# Altium PCB Shopping_Cart.PcbDoc (part 1 of 2)
Units mil, origin at the board's own origin, x right, y up, seen from the top; angles counter-clockwise.
Board outline 3350 x 1865 mil, 2 copper layers (Top Layer, Bottom Layer); 76 components, 56 nets, 246 pads, 179 vias.
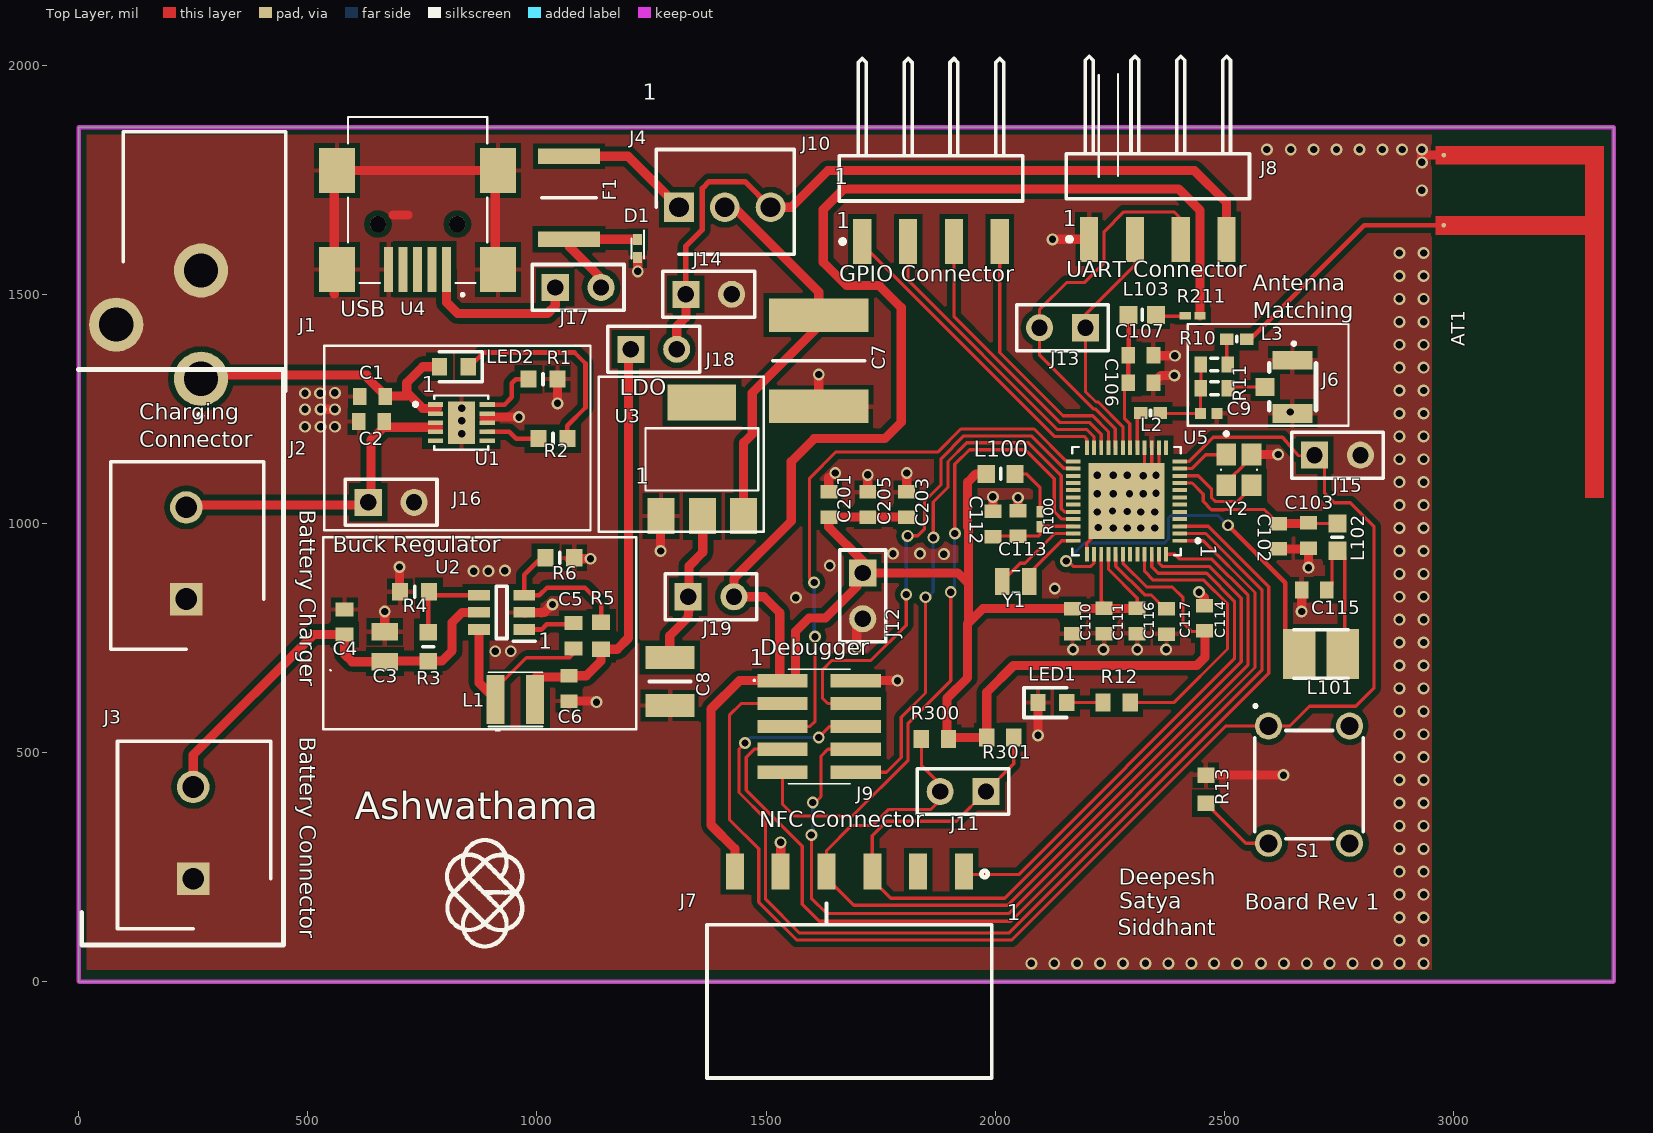
[diagram p0: Top Layer view]
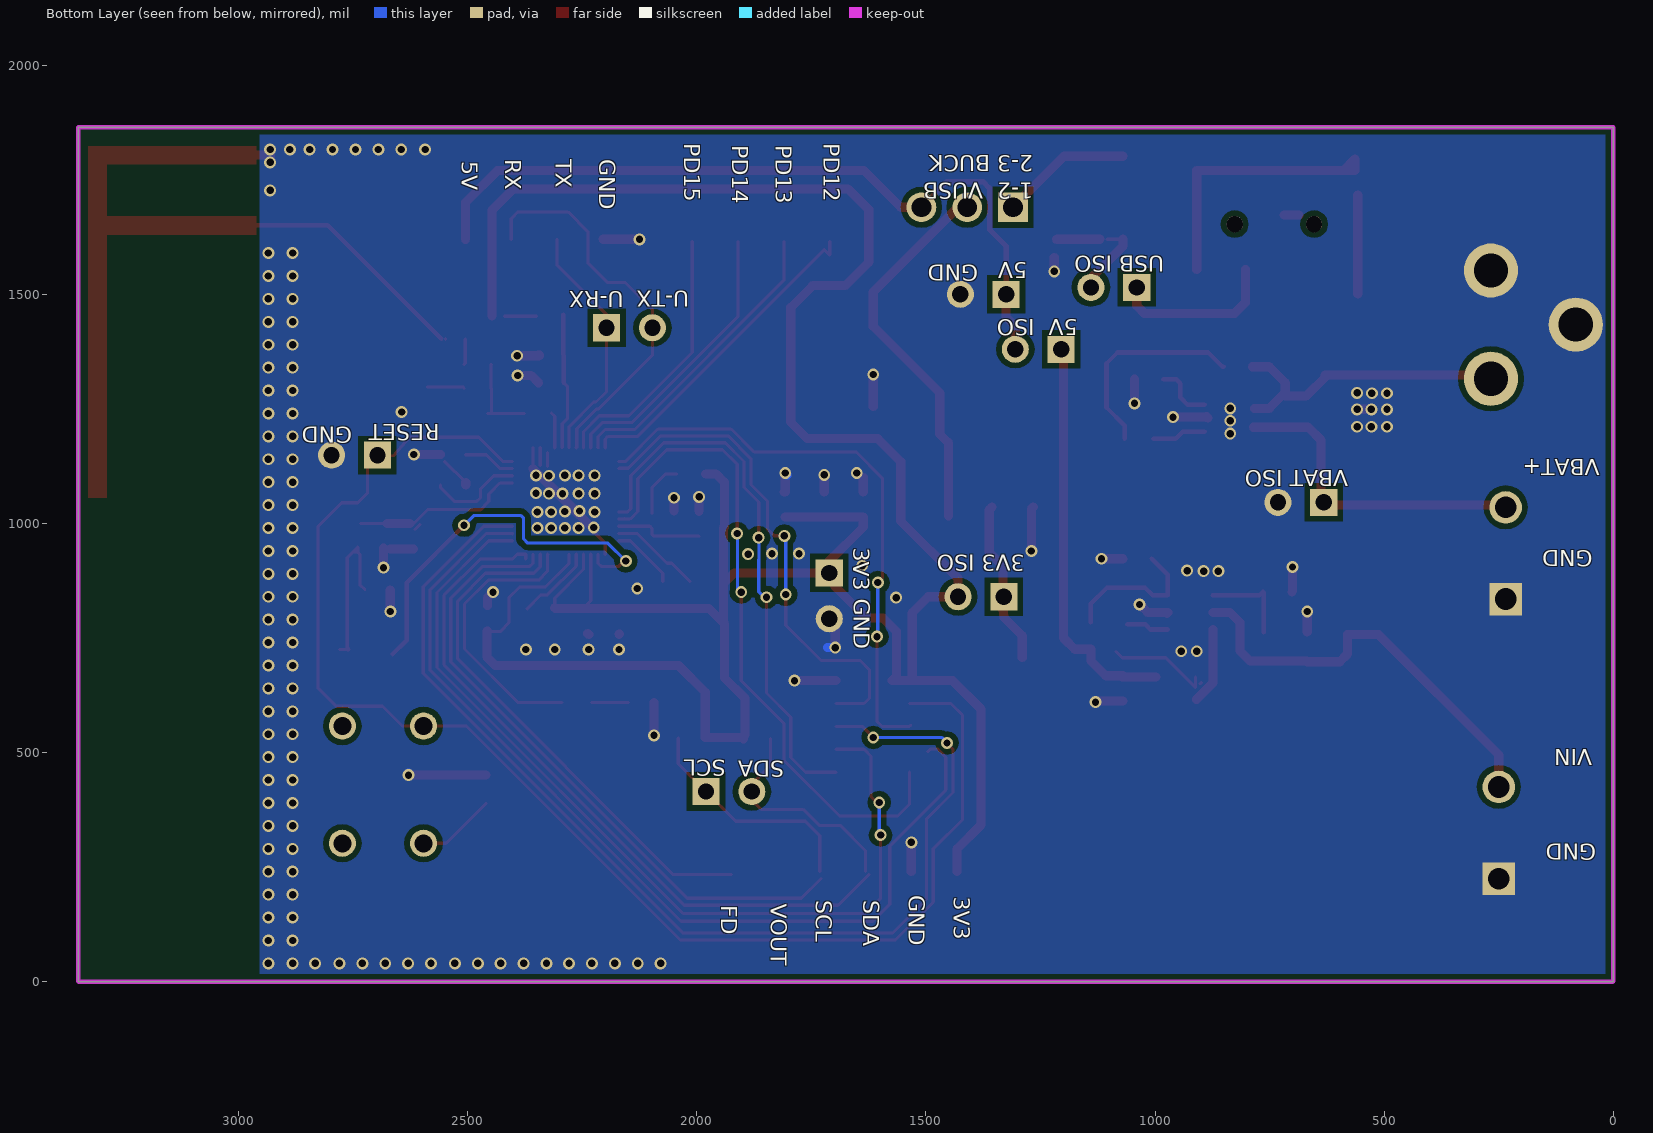
[diagram p1: Bottom Layer view, seen from below]
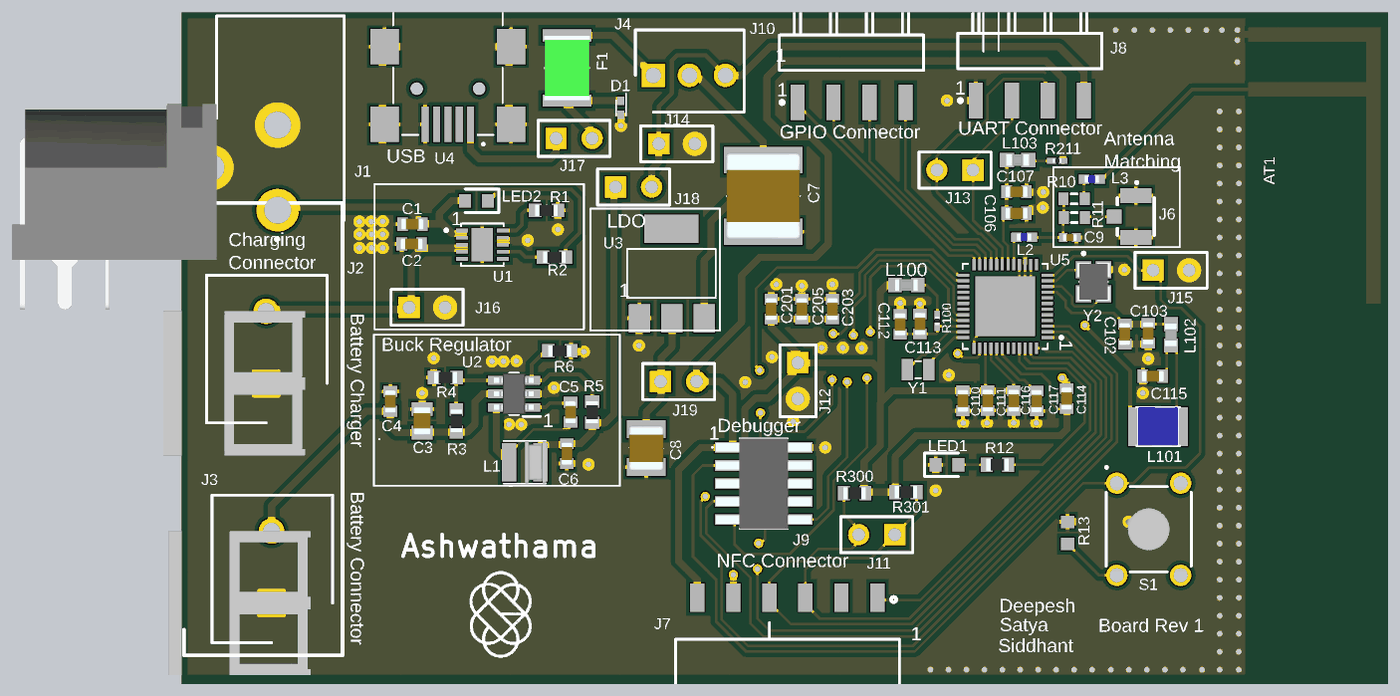
[diagram p2: 3D render of the assembled board from above, using the file's embedded part models]

## Layer stack, top to bottom
Top Solder: solder mask 0.4, Solder Resist, Dk 3.5
Top Layer: signal copper 1.4
Dielectric1: dielectric 12.6, FR-4, Dk 4.8
Bottom Layer: signal copper 1.4
Bottom Solder: solder mask 0.4, Solder Resist, Dk 3.5

## Board outline
0,0 0,1865 3350,1865 3350,0

## Design rules (kind name [scope] priority, off if disabled: settings)
Clearance [All] p1: gap=10 ignorepadtopadclearanceinfootprint=FALSE except(0: Arc-Hole Track-Hole SMDPad-Hole THPad-Hole Via-Hole Fill-Hole Poly-Hole Region-Hole Text-Hole; 7: Arc-SMDPad Arc-Via Track-SMDPad Track-Via SMDPad-SMDPad SMDPad-Via THPad-Via Via-Via Via-Fill Via-Region Via-Text; 8: Arc-Track Track-Track; 12: Arc-Poly Track-Poly SMDPad-Poly THPad-Poly Via-Poly Fill-Poly Poly-Poly)
ComponentClearance [All] p1: gap=10 collisioncheckmode=3 verticalgap=10 showdistances=TRUE
FabricationTestPointUsage TestPointUsage [All] p1: valid=0 allowmultiple=FALSE
FabricationTestpoint Testpoint [All] p1: side=3 testpointundercomponent=TRUE minsize=40 maxsize=100 preferedsize=60 minholesize=0 maxholesize=40 preferedholesize=32 testpointgrid=1 allowsidetop=TRUE allowsidebottom=TRUE usegrid=TRUE gridtolerance=0.01
PlaneConnect [All] p1: planeconnectstyle=Direct reliefexpansion=20 reliefentries=4 reliefconductorwidth=10 reliefairgap=10
PolygonConnect [All] p1: thpad.connectstyle=Direct thpad.reliefconductorwidth=10 thpad.reliefentries=4 thpad.polygonreliefangle="90 Angle" thpad.airgapwidth=10 smdpad.connectstyle=Relief smdpad.reliefconductorwidth=10 smdpad.reliefentries=4 smdpad.polygonreliefangle="90 Angle" smdpad.airgapwidth=10 via.connectstyle=Direct via.reliefconductorwidth=10 via.reliefentries=4 via.polygonreliefangle="90 Angle" via.airgapwidth=10
RoutingVias [All] p1: holewidth=10 width=20 viastyle="Through Hole" minholewidth=8 minwidth=10 maxholewidth=20 maxwidth=50
SilkToSolderMaskClearance SilkscreenOverComponentPads [IsPad] p1: minsilkscreentomaskgap=10 clearancetoexposedcopper=TRUE
SolderMaskExpansion [All] p1: expansion=4
Width [InNet('5V') or InNet('GND') or InNet('3V3')] p1: maxlimit=24 minlimit=7 preferedwidth=20
Width Signal [All] p2: maxlimit=20 minlimit=6 preferedwidth=7
25 further rules are at their usual default settings.

## Classes and differential pairs
component class "Power Supply": D1 J2 J3 J17 U4
component class Peripherals: J7 J8 J9 J10 J11 J12 J13 J14 J15 R300 R301
component class MicroController: C102 C103 C106 C107 C110 C111 C112 C113 C114 C115 C116 C117 C201 C203 C205 L100 L101 L102 L103 LED1 R12 R13 R100 R211 S1 U5 Y1 Y2
component class LDO-Regulator: C7 C8 F1 J4 J19 U3
component class F_Antenna: C9 J6 L2 L3 R10 R11
component class Buck-Regulator: C3 C4 C5 C6 J18 L1 R3 R4 R5 R6 U2
component class Battery_Management: C1 C2 J1 J16 LED2 R1 R2 U1

## Components (designator, comment, footprint, x,y, rotation, side; value= is the part's Value field where it differs from the comment)
AT1 "INVERTED_F" ANT_INV_F_2.4_GHZ_FS_19.5MM_MIR 2961.15,1823.51 r270 top net-tie
C1 "GRM188R61E475KE11D" CAPC1608X90N 641,1277 r180 top value=4U7
C2 "GRM188R61E475KE11D" CAPC1608X90N 639,1222 r0 top value=4U7
C3 "GRM21BR71C225KA12L" CAPC2012X145N 668,731 r270 top value=2U2
C4 "C0603C104K4RECTU" CAPC1608X87N 580,785 r270 top value=0U1
C5 "C0603C104K4RECTU" CAPC1608X87N 1080,755 r90 top value=0U1
C6 "GRM1885C2A150JA01D" CAPC1608X90N 1070,640 r270 top value=15U
C7 "KCM55LR71E156KH01K" CAPC6153X300N 1615,1355 r90 top value=10U
C8 "GRM32ER71C226KEA8L" CAPC3225X270N 1290,655 r90 top value=22U
C9 "GRM1555C1H1R5WA01D" CAPC1005X55N 2466.04,1240 r180 top value=1P5
C102 "GCM1885C1H101JA16D" CAPC1608X90N 2618.44,972 r270 top value=100P
C103 "GRM1885C1H100JA01D" CAPC1608X90N 2683.6,973.85 r270 top value=10P
C106 "GRM188R71C224KA01D" CAPC1608X90N 2318,1307 r0 top value=220N
C107 "GRM1885C1H100JA01D" CAPC1608X90N 2318,1367 r0 top value=10P
C110 "GRM188R60J106ME84D" CAPC1608X90N 2169,786.56 r90 top value=10U
C111 "GRM188R61E105KAADD" CAPC1608X90N 2238,787.12 r270 top value=1U
C112 "GRM188R60J106ME84D" CAPC1608X90N 1995,999 r270 top value=10U
C113 "CC0603KRX7R7BB103" CAPC1608X90N 2050,1000 r270 top value=10N
C114 "GRM188R61E105KAADD" CAPC1608X90N 2457,793 r90 top value=1U
C115 "GRM188R61E475KE11D" CAPC1608X90N 2696.44,855 r180 top value=4U7
C116 "GCM188R71C104KA37D" CAPC1608X90N 2310,787 r270 top value=100N
C117 "GRM188R61E105KAADD" CAPC1608X90N 2374,786 r270 top value=1U
C201 "GCM188R71C104KA37D" CAPC1608X90N 1637,1041.28 r270 top value=100N
C203 "GCM188R71C104KA37D" CAPC1608X90N 1807,1041.28 r270 top value=100N
C205 "GRM188R61C106KAALJ" CAPC1608X90N 1722,1041.28 r270 top value=10U
D1 "TPD1E10B06DPYT" DPY(R-PX1SON-N2) 1220,1600 r270 top
F1 "MF-MSMF050-2" FUSC4632X85N 1070,1710.55 r270 top
J1 "PJ-102A" PJ-102AH 97.71,1433.89 r0 top
J2 "282837-2" SHDR2W100P0X508_1X2_1016X820X1030P 235,835 r90 top
J3 "282837-2" SHDR2W100P0X508_1X2_1016X820X1030P 250,225 r90 top
J4 "61900311121" SHDR3W64P0X254_1X3_766X580X1175P 1310,1690 r0 top
J6 "U.FL-R-SMT(01)" U.FL-R-SMT(01) 2649.04,1298 r270 top
J7 "BG300-06-X-X-A_REVC" *GCT_BG300-06-X-X-A_REVC 1682,35 r180 top
J8 "BG301-04-X-XXXX-X-X_REVC" *GCT_BG301-04-X-XXXX-X-X_REVC 2355,1620 r0 top
J9 "FTSH-105-01-L-DV-K-TR" FTSH10501LDVKTR 1616,557 r270 top
J10 "BG301-04-X-XXXX-X-X_REVC" *GCT_BG301-04-X-XXXX-X-X_REVC 1860,1615 r0 top
J11 "Header 2" HDR1X2 1980,415 r180 top
J12 "Header 2" HDR1X2 1711,892 r270 top
J13 "Header 2" HDR1X2 2197,1427 r180 top
J14 "Header 2" HDR1X2 1325,1500 r0 top
J15 "Header 2" HDR1X2 2697,1149 r0 top
J16 "Header 2" HDR1X2 632,1046 r0 top
J17 "Header 2" HDR1X2 1040,1515 r0 top
J18 "Header 2" HDR1X2 1205,1380 r0 top
J19 "Header 2" HDR1X2 1330,840 r0 top
L1 "SRN3015-220M" SRN3015 953,616 r270 top value=22U
L2 "LQP15MN1N9W02D" INDC1005X45N 2339,1241 r0 top value=1N9
L3 "LQP15MN1N9W02D" INDC1005X45N 2527.04,1402 r0 top value=1N9
L100 "74279266" BEADC1608X100N 2012,1108 r0 top
L101 "SRN3015-4R7M" INDPM3027X150N 2711,715 r0 top
L102 "BLM18AG601SN1D" BEADC1608X95N 2746.59,969.91 r90 top
L103 "BLM18AG601SN1D" BEADC1608X95N 2321,1455 r180 top
LED1 "SML-D12U1WT86" LEDC1608X65N 2125,609 r0 top
LED2 "SML-D12U1WT86" LEDC1608X65N 819,1342 r180 top
R1 "ERJ-3EKF2371V" RESC1608X55N 1013.25,1315 r180 top value=2K37
R2 "RC0603FR-071KL" RESC1608X55N 1035,1185 r0 top value=1K
R3 "CR0603-FX-7503ELF" RESC1608X55N 763,731 r270 top value=750K
R4 "CR0603-FX-2943ELF" RESC1608X55N 733,851 r0 top value=294K
R5 "CRCW060388K7FKEA" RESC1608X50N 1140,755 r270 top value=88.7K
R6 "RC0603FR-0722K1L" RESC1608X55N 1050,925 r180 top value=22.1K
R10 "Res3" J1-0603 2478.04,1347 r0 top value=0R
R11 "Res3" J1-0603 2478.51,1295 r0 top value=0R
R12 "RCS06034K70FKEA" RESC1608X50N 2265,609 r180 top value=4K7
R13 "1-2176326-3" *RESC1608X55N 2460,420 r90 top value=100R
R100 "CRCW02011R00FXED" RESC0603X28N 2098,1009 r270 top
R211 "CRCW02010000Z0ED" RESC0603X28N 2431,1453 r180 top value=0R
R300 "RCS06034K70FKEA" RESC1608X50N 1868.53,530 r0 top value=4K7
R301 "RCS06034K70FKEA" RESC1608X50N 2011,533 r180 top value=4K7
S1 "1825910-6" 1825910-6 2685,430 r90 top
U1 "MCP73213-A6SI/MF" *SON50P300X300X100-11N 835,1220 r0 top
U2 "TPS560430XFDBVR" SOT95P280X145-6N 923,806 r180 top
U3 "LM1117-3.3" *SOT-223 1360,1140 r0 top
U4 "UJ2-MABH-2-SMT" *CUI_UJ2-MABH-2-SMT_UJ2-MABH-2-SMT(Primary) 802.58,1554.25 r180 top
U5 "EFR32BG13P632F512GM48-C" *QFN40P600X600X100-49N 2286.62,1048.86 r180 top
Y1 "CM8V-T1A-32.768kHz-12.5pF-20PPM-TA-QC" CM8V32768TA020125 2045,873 r0 top
Y2 "FA-20H_38.4000MF10Z-AS3" FA20H300000MF20XW 2532,1117 r270 top

## Footprints (in the part's own frame and the unit in brackets; to place one, negate y for a bottom-side part, rotate by r counter-clockwise, add the part's x,y. Pads: shape width x height; smd on the part's side, far side on the other; paste and mask are expansions set on the pad)
1825910-6 [mm]
  round 1.5 hole 1: 1(3.25,2.25) 2(3.25,-2.25) 3(-3.25,2.25) 4(-3.25,-2.25)
  silkscreen extent -3,-3 4.42,3.04, body extent -3,-3.9 3,3.9
*CUI_UJ2-MABH-2-SMT_UJ2-MABH-2-SMT(Primary) [mm]
  rect 0.5x2.5 smd: 1(0,0) 2(0.8,0) 3(1.6,0) 4(2.4,0) 5(3.2,0)
  round 0.9 hole 0.9 unplated: None(-0.6,-2.51) None(3.8,-2.51)
  rect 2x2.5 smd: SH1(-2.86,0) SH2(6.06,0) SH3(-2.86,-5.48) SH4(6.06,-5.48)
  silkscreen extent -2.26,-8.45 5.46,1.48
*GCT_BG300-06-X-X-A_REVC [mm]
  rect 1x2 smd: 1(-6.35,-5.225) 2(-3.81,-5.225) 3(-1.27,-5.225) 4(1.27,-5.225) 5(3.81,-5.225) 6(6.35,-5.225)
  silkscreen extent -7.9,-5.26 7.9,6.22
*GCT_BG301-04-X-XXXX-X-X_REVC [mm]
  rect 1x2.5 smd: 1(-3.81,0) 2(-1.27,0) 3(1.27,0) 4(3.81,0)
  silkscreen extent -5.08,-0.12 5.08,10.15
*QFN40P600X600X100-49N [mm]
  rect 0.81x0.22 smd: 1(-2.95,2.2) 2(-2.95,1.8) 3(-2.95,1.4) 4(-2.95,1) 5(-2.95,0.6) 6(-2.95,0.2) 7(-2.95,-0.2) 8(-2.95,-0.6) 9(-2.95,-1) 10(-2.95,-1.4) 11(-2.95,-1.8) 12(-2.95,-2.2) 25(2.95,-2.2) 26(2.95,-1.8) 27(2.95,-1.4) 28(2.95,-1) 29(2.95,-0.6) 30(2.95,-0.2) 31(2.95,0.2) 32(2.95,0.6) 33(2.95,1) 34(2.95,1.4) 35(2.95,1.8) 36(2.95,2.2)
  rect 0.22x0.81 smd: 13(-2.2,-2.95) 14(-1.8,-2.95) 15(-1.4,-2.95) 16(-1,-2.95) 17(-0.6,-2.95) 18(-0.2,-2.95) 19(0.2,-2.95) 20(0.6,-2.95) 21(1,-2.95) 22(1.4,-2.95) 23(1.8,-2.95) 24(2.2,-2.95) 37(2.2,2.95) 38(1.8,2.95) 39(1.4,2.95) 40(1,2.95) 41(0.6,2.95) 42(0.2,2.95) 43(-0.2,2.95) 44(-0.6,2.95) 45(-1,2.95) 46(-1.4,2.95) 47(-1.8,2.95) 48(-2.2,2.95)
  rect 4.2x4.2 smd: 49(0,0)
  silkscreen extent -4.06,-3 3,3
*RESC1608X55N [mm]
  rect 0.87x0.93 smd: 1(-0.78,0) 2(0.78,0)
*SON50P300X300X100-11N [mm]
  rect 0.84x0.26 smd: 1(-1.435,1) 2(-1.435,0.5) 3(-1.435,0) 4(-1.435,-0.5) 5(-1.435,-1) 6(1.435,-1) 7(1.435,-0.5) 8(1.435,0) 9(1.435,0.5) 10(1.435,1)
  rect 1.5x2.35 smd: 11(0,0)
  silkscreen extent -2.64,-1.5 1.5,1.5
*SOT-223 [mil]
  rect 59x79 smd: 1(-89,-124) 2(1,-124) 3(91,-124)
  rect 150x79 smd: 4(0,124)
  silkscreen extent -123,-68 123,68
ANT_INV_F_2.4_GHZ_FS_19.5MM_MIR [mil] "F-ANTENNA INVERSE 19.5 mm"
  round 10 smd paste-10 mask-10: 1(172.68,17.72) 2(19.68,17.85)
  Top Layer region: 0,367.2 767.72,367.2 767.72,327.07 193,327.07 193,0 153,0 153,327.07 40,327.07 40,0 20,0 0,0
BEADC1608X95N [mm]
  rect 1x1 smd: 1(-0.75,0) 2(0.75,0)
  silkscreen extent 0,-0.3 0,0.3, body extent -0.8,-0.4 0.8,0.4, height 0.95
BEADC1608X100N [mm]
  rect 0.95x1 smd: 1(-0.8,0) 2(0.8,0)
  silkscreen extent 0,-0.3 0,0.3, body extent -0.8,-0.4 0.8,0.4, height 1
CAPC1005X55N [mm]
  rect 0.6x0.62 smd: 1(-0.46,0) 2(0.46,0)
  body extent -0.5,-0.25 0.5,0.25, height 0.55
CAPC1608X87N [mm]
  rect 0.78x0.98 smd: 1(-0.7,0) 2(0.7,0)
  body extent -0.8,-0.4 0.8,0.4, height 0.87
CAPC1608X90N [mm]
  rect 0.75x0.94 smd: 1(-0.7,0) 2(0.7,0)
  body extent -0.8,-0.4 0.8,0.4, height 0.9
CAPC2012X145N [mm]
  rect 0.97x1.47 smd: 1(-0.83,0) 2(0.83,0)
  body extent -1,-0.63 1,0.63, height 1.45
CAPC3225X270N [mm]
  rect 1.26x2.72 smd: 1(-1.33,0) 2(1.33,0)
  silkscreen extent 0,-1.15 0,1.15, body extent -1.6,-1.25 1.6,1.25, height 2.7
CAPC6153X300N [mm]
  rect 1.86x5.52 smd: 1(-2.53,0) 2(2.53,0)
  silkscreen extent 0,-2.55 0,2.55, body extent -3.05,-2.65 3.05,2.65, height 3
CM8V32768TA020125 [mm]
  rect 0.8x1.5 smd: 1(-0.75,0) 2(0.75,0)
  silkscreen extent -0.2,-0.6 0.2,0.6
DPY(R-PX1SON-N2) [mm]
  rect 0.6x0.5 smd: 1(-0.5,0) 2(0.5,0)
  silkscreen extent -1,-0.35 0.55,0.35
FA20H300000MF20XW [mm]
  rect 1.2x1.1 smd: 1(-0.85,-0.7) 2(0.85,-0.7) 3(0.85,0.7) 4(-0.85,0.7)
  silkscreen extent -2.1,-1 0.03,1, body extent -1.34,-1.14 1.34,1.14, height 0.65
FTSH10501LDVKTR [mm]
  rect 0.74x2.79 smd: 1(-2.54,-2.035) 2(-2.54,2.035) 3(-1.27,-2.035) 4(-1.27,2.035) 5(0,-2.035) 6(0,2.035) 7(1.27,-2.035) 8(1.27,2.035) 9(2.54,-2.035) 10(2.54,2.035)
  silkscreen extent -3.18,-3.65 3.18,1.72, body extent -3.18,-3.36 3.18,3.36, height 5.66
FUSC4632X85N [mm]
  rect 0.85x3.43 smd: 1(-2.3,0) 2(2.3,0)
  silkscreen extent 0,-1.52 0,1.52, body extent -2.27,-1.62 2.27,1.62, height 0.85
HDR1X2 [mm] "Connector; Header; 2 Position"
  rect 1.5x1.5 hole 0.9: 1(0,0)
  round 1.5 hole 0.9: 2(2.54,0)
  silkscreen extent -1.27,-1.27 3.81,1.27
INDC1005X45N [mm]
  rect 0.75x0.65 smd: 1(-0.55,0) 2(0.55,0)
  silkscreen extent 0,-0.15 0,0.15, body extent -0.5,-0.25 0.5,0.25, height 0.45
INDPM3027X150N [mm]
  rect 1.8x2.75 smd: 1(-1.2,0) 2(1.2,0)
  silkscreen extent -1.5,-1.35 1.5,1.35, body extent -1.5,-1.35 1.5,1.35, height 1.5
J1-0603 [mm] "Chip Resistor, Body 1.6x0.8mm, IPC High Density"
  rect 0.7x0.9 smd: 1(-0.75,0) 2(0.75,0)
  silkscreen extent -0.2,-0.35 0.2,0.35, body extent -0.85,-0.48 0.85,0.48, height 0.9
LEDC1608X65N [mm]
  rect 0.85x0.95 smd: 1(-0.8,0) 2(0.8,0)
  silkscreen extent -1.58,-0.82 0.8,0.82
PJ-102AH [mm]
  round 3 hole 1.9: 1(4.3,-3) 2(4.3,3) 3(-0.4,0)
  silkscreen extent 0,-5.17 9,10.7, body extent -14.4,-10 0,4.5, height 4.5
RESC0603X28N [mm]
  rect 0.625x0.4 smd: 1(-0.412,0) 2(0.412,0)
  body extent -0.3,-0.15 0.3,0.15, height 0.28
RESC1608X50N [mm]
  rect 0.85x1 smd: 1(-0.75,0) 2(0.75,0)
  body extent -0.79,-0.43 0.79,0.43, height 0.5
RESC1608X55N [mm]
  rect 0.9x0.95 smd: 1(-0.8,0) 2(0.8,0)
  silkscreen extent 0,-0.3 0,0.3, body extent -0.8,-0.4 0.8,0.4, height 0.55
SHDR2W100P0X508_1X2_1016X820X1030P [mm]
  rect 1.8x1.8 hole 1.2: 1(0,0)
  round 1.8 hole 1.2: 2(5.08,0)
  silkscreen extent -2.79,-4.3 7.62,4.2, body extent -5.68,-6.25 5.08,7.25
SHDR3W64P0X254_1X3_766X580X1175P [mm]
  rect 1.65x1.65 hole 1.1: 1(0,0)
  round 1.65 hole 1.1: 2(2.54,0) 3(5.08,0)
  silkscreen extent -1.27,-2.6 6.39,3.2
SOT95P280X145-6N [mm]
  rect 1.2x0.6 smd: 1(-1.25,0.95) 2(-1.25,0) 3(-1.25,-0.95) 4(1.25,-0.95) 5(1.25,0) 6(1.25,0.95)
  silkscreen extent -1.85,-1.45 0.3,1.6, body extent -1.4,-1.45 1.4,1.45, height 1.45
SRN3015 [mm]
  rect 2.7x1 smd: 1(0,-1.1) 2(0,1.1)
  silkscreen extent -1.5,-1.5 1.5,1.5, body extent -1.5,0 1.5,1.5, height 1.5
U.FL-R-SMT(01) [mm]
  rect 1.05x2.2 smd: 1(-1.475,0) 2(1.475,0)
  rect 1x1.05 smd: 3(0,-1.525)
  silkscreen extent -2.45,-1.3 1.3,1.3

## Part data
C1 C2 C115: "Capacitor", Manufacturer_Name="Murata Electronics", Mouser Part Number=81-GRM188R61E475KE1D, RS Part Number=8151386P, Datasheet Link=https://psearch.en.murata.com/capacitor/product/GRM188R61E475KE11%23.html, Height=0.9mm, Manufacturer_Part_Number=GRM188R61E475KE11D, Mouser Price/Stock=https://www.mouser.com/Search/Refine.aspx?Keyword=81-GRM188R61E475KE1D, RS Price/Stock=http://uk.rs-online.com/web/p/products/8151386P
C3: "Capacitor", Manufacturer_Name="Murata Electronics", Mouser Part Number=81-GRM21BR71C225KA2L, RS Part Number=7236076, Datasheet Link=http://www.murata.com/~/media/webrenewal/support/library/catalog/products/capacitor/mlcc/c02e.pdf, Height=1.45mm, Manufacturer_Part_Number=GRM21BR71C225KA12L, Mouser Price/Stock=https://www.mouser.com/Search/Refine.aspx?Keyword=81-GRM21BR71C225KA2L, RS Price/Stock=https://uk.rs-online.com/web/p/products/7236076
C4 C5: "Capacitor", Manufacturer_Name=Kemet, Mouser Part Number=80-C0603C104K4RECTU, Datasheet Link=https://api.kemet.com/component-edge/download/datasheet/C0603C104K4RECTU.pdf, Height=0.87mm, Manufacturer_Part_Number=C0603C104K4RECTU, Mouser Price/Stock=https://www.mouser.com/Search/Refine.aspx?Keyword=80-C0603C104K4RECTU
C6: "Capacitor", Manufacturer_Name="Murata Electronics", Mouser Part Number=81-GRM1885C2A150JA01, RS Part Number=8151516, Datasheet Link=http://www.murata.com/~/media/webrenewal/support/library/catalog/products/capacitor/mlcc/c02e.pdf, Height=0.9mm, Manufacturer_Part_Number=GRM1885C2A150JA01D, Mouser Price/Stock=https://www.mouser.com/Search/Refine.aspx?Keyword=81-GRM1885C2A150JA01, RS Price/Stock=https://uk.rs-online.com/web/p/products/8151516
C7: "Capacitor", Manufacturer_Name="Murata Electronics", Mouser Part Number=81-KCM55LR71E156KH1K, Datasheet Link=https://psearch.en.murata.com/capacitor/product/KCM55LR71E156KH01%23.html, Height=3mm, Manufacturer_Part_Number=KCM55LR71E156KH01K, Mouser Price/Stock=https://www.mouser.com/ProductDetail/Murata-Electronics/KCM55LR71E156KH01K?qs=%2Fha2pyFadujTVicYMwxGf6al2IEnlbtrqh1JmJOdYSsKFh9aAuQRmXZk846chQr1
C8: "Capacitor", Manufacturer_Name="Murata Electronics", Mouser Part Number=81-GRM32ER71C226KEAL, Datasheet Link=http://psearch.en.murata.com/capacitor/product/GRM32ER71E226KE15%23.pdf, Height=2.7mm, Manufacturer_Part_Number=GRM32ER71C226KEA8L, Mouser Price/Stock=https://www.mouser.com/Search/Refine.aspx?Keyword=81-GRM32ER71C226KEAL
C9: "Capacitor", Manufacturer_Name="Murata Electronics", Mouser Part Number=81-GRM1555C1H1R5WA1D, RS Part Number=8145441, Datasheet Link=http://www.murata.com/~/media/webrenewal/support/library/catalog/products/capacitor/mlcc/c02e.pdf, Height=0.55mm, Manufacturer_Part_Number=GRM1555C1H1R5WA01D, Mouser Price/Stock=https://www.mouser.com/Search/Refine.aspx?Keyword=81-GRM1555C1H1R5WA1D, RS Price/Stock=https://uk.rs-online.com/web/p/products/8145441
C102: "Capacitor", Manufacturer_Name="Murata Electronics", Mouser Part Number=81-GCM1885C1H101JA6D, RS Part Number=7235014, Datasheet Link=https://componentsearchengine.com/Datasheets/2/GCM1885C1H101JA16D.pdf, Height=0.9mm, Manufacturer_Part_Number=GCM1885C1H101JA16D, Mouser Price/Stock=https://www.mouser.com/Search/Refine.aspx?Keyword=81-GCM1885C1H101JA6D, RS Price/Stock=https://uk.rs-online.com/web/p/products/7235014
C103 C107: "Capacitor", Manufacturer_Name="Murata Electronics", Mouser Part Number=81-GRM39C100D50, RS Part Number=6242339P, Datasheet Link=http://psearch.en.murata.com/capacitor/product/GRM1885C1H100JA01%23.pdf, Height=0.9mm, Manufacturer_Part_Number=GRM1885C1H100JA01D, Mouser Price/Stock=https://www.mouser.com/Search/Refine.aspx?Keyword=81-GRM39C100D50, RS Price/Stock=http://uk.rs-online.com/web/p/products/6242339P
C106: "Capacitor", Manufacturer_Name="Murata Electronics", Manufacturer_Part_Number=CC0603KPX77BB224, Mouser Part Number=603-CC0603KPX77BB224, RS Part Number=7235610, Datasheet Link=http://www.murata.com/~/media/webrenewal/support/library/catalog/products/capacitor/mlcc/c02e.pdf, Height=0.9mm, Mouser Price/Stock=https://www.mouser.com/Search/Refine.aspx?Keyword=81-GRM188R71C224KA01, RS Price/Stock=https://uk.rs-online.com/web/p/products/7235610
C110 C112: "Capacitor", Manufacturer_Name="Murata Electronics", Mouser Part Number=81-GRM188R60J106ME4D, RS Part Number=8847242P, Datasheet Link=http://www.murata.com/~/media/webrenewal/support/library/catalog/products/capacitor/mlcc/c02e.pdf, Height=0.9mm, Manufacturer_Part_Number=GRM188R60J106ME84D, Mouser Price/Stock=https://www.mouser.com/Search/Refine.aspx?Keyword=81-GRM188R60J106ME4D, RS Price/Stock=http://uk.rs-online.com/web/p/products/8847242P
C111 C114 C117: "Capacitor", Manufacturer_Name="Murata Electronics", Mouser Part Number=81-GRM188R61E105KADD, RS Part Number=8467290P, Datasheet Link=http://www.murata.com/~/media/webrenewal/support/library/catalog/products/capacitor/mlcc/c02e.pdf, Height=0.9mm, Manufacturer_Part_Number=GRM188R61E105KAADD, Mouser Price/Stock=https://www.mouser.com/Search/Refine.aspx?Keyword=81-GRM188R61E105KADD, RS Price/Stock=http://uk.rs-online.com/web/p/products/8467290P
C113: "Capacitor", Manufacturer_Name="YAGEO (PHYCOMP)", Mouser Part Number=603-CC603KRX7R7BB103, Datasheet Link=http://www.yageo.com/documents/recent/UPY-GPHC_X7R_6.3V-to-50V_18.pdf, Height=0.9mm, Manufacturer_Part_Number=CC0603KRX7R7BB103, Mouser Price/Stock=https://www.mouser.com/Search/Refine.aspx?Keyword=603-CC603KRX7R7BB103
C116 C201 C203: "Capacitor", Manufacturer_Name="Murata Electronics", Mouser Part Number=81-GCM188R71C104KA7D, RS Part Number=8151276, Datasheet Link=https://psearch.en.murata.com/capacitor/product/GCM188R71C104KA37%23.pdf, Height=0.9mm, Manufacturer_Part_Number=GCM188R71C104KA37D, Mouser Price/Stock=https://www.mouser.com/Search/Refine.aspx?Keyword=81-GCM188R71C104KA7D, RS Price/Stock=http://uk.rs-online.com/web/p/products/8151276
C205: "Capacitor", Manufacturer_Name="Murata Electronics", Mouser Part Number=81-GRM188R61C106KALJ, Datasheet Link=https://psearch.en.murata.com/capacitor/product/GRM188R61C106KAAL%23.html, Height=0.9mm, Manufacturer_Part_Number=GRM188R61C106KAALJ, Mouser Price/Stock=https://www.mouser.com/Search/Refine.aspx?Keyword=81-GRM188R61C106KALJ
D1: "TVS Diode (Bi-directional)", Manufacturer_Name="Texas Instruments", Mouser Part Number=595-TPD1E10B06DPYT, Datasheet Link=http://www.ti.com/lit/ds/symlink/tpd1e10b06.pdf, Manufacturer_Part_Number=TPD1E10B06DPYT, Mouser Price/Stock=https://www.mouser.com/Search/Refine.aspx?Keyword=595-TPD1E10B06DPYT
F1: "Fuse", Manufacturer_Name=Bourns, Mouser Part Number=652-MF-MSMF050-2, RS Part Number=6478156P, Allied_Number=70153466, Allied Price/Stock=https://www.alliedelec.com/bourns-mf-msmf050-2/70153466/, Datasheet Link=https://www.bourns.com/pdfs/mfmsmf.pdf, Height=0.85mm, Manufacturer_Part_Number=MF-MSMF050-2, Mouser Price/Stock=https://www.mouser.com/Search/Refine.aspx?Keyword=652-MF-MSMF050-2, RS Price/Stock=http://uk.rs-online.com/web/p/products/6478156P
J1: "Connector", Manufacturer_Name=CUI, Mouser Part Number=490-PJ-102A, Datasheet Link=https://www.cui.com/product/resource/pj-102a.pdf, Manufacturer_Part_Number=PJ-102A, Mouser Price/Stock=https://www.mouser.com/Search/Refine.aspx?Keyword=490-PJ-102A
J2 J3: "Connector", Manufacturer_Name="TE Connectivity", Mouser Part Number=571-2828372, RS Part Number=7100100P, Allied_Number=70086281, Allied Price/Stock=https://www.alliedelec.com/te-connectivity-282837-2/70086281/, Datasheet Link=http://www.te.com/commerce/DocumentDelivery/DDEController?Action=showdoc&DocId=Customer+Drawing%7F282837%7FG3%7Fpdf%7FEnglish%7FENG_CD_282837_G3.pdf%7F282837-2, Height=10.3mm, Manufacturer_Part_Number=282837-2, Mouser Price/Stock=https://www.mouser.com/Search/Refine.aspx?Keyword=571-2828372, RS Price/Stock=http://uk.rs-online.com/web/p/products/7100100P
J4: "Connector", Manufacturer_Name="Wurth Elektronik", Mouser Part Number=710-61900311121, RS Part Number=8281474P, Datasheet Link=https://katalog.we-online.de/em/datasheet/61900311121.pdf, Height=11.75mm, Manufacturer_Part_Number=61900311121, Mouser Price/Stock=https://www.mouser.com/Search/Refine.aspx?Keyword=710-61900311121, RS Price/Stock=http://uk.rs-online.com/web/p/products/8281474P
J6: "Connector", Manufacturer_Name=Hirose, Mouser Part Number=798-U.FL-R-SMT01, RS Part Number=4812324P, Datasheet Link=https://www.hirose.com/product/en/download_file/key_name/U.FL-R-SMT-1%2832%29/category/Drawing%20(2D)/doc_file_id/37630/?file_category_id=6&item_id=03310472232&is_series=, Manufacturer_Part_Number=U.FL-R-SMT(01), Mouser Price/Stock=https://www.mouser.com/Search/Refine.aspx?Keyword=798-U.FL-R-SMT01, RS Price/Stock=http://uk.rs-online.com/web/p/products/4812324P
J7: "6 POS Right Angle Header", Digi-Key Part Number=2073-BG300-06-A-L-ACT-ND, Manufacturer_Name="Global Connector Technology", Manufacturer_Part_Number=BG300-06-A-L-A, Detailed Description="6 Position Receptacle Connector Surface Mount, Right Angle", Digikey Price/Stock=https://www.digikey.com/product-detail/en/gct/BG300-06-A-L-A/2073-BG300-06-A-L-ACT-ND/9859667?utm_source=snapeda&utm_medium=aggregator&utm_campaign=symbol
J8 J10: "4 POS Right Angle Header", Digi-Key Part Number=2073-BG301-04-A-0540-L-BCT-ND, Manufacturer_Name="Global Connector Technology", Manufacturer_Part_Number=BG301-04-A-0540-L-B, Digikey Price/Stock=https://www.digikey.com/product-detail/en/gct/BG301-04-A-0540-L-B/2073-BG301-04-A-0540-L-BCT-ND/9859670?utm_source=snapeda&utm_medium=aggregator&utm_campaign=symbol
J9: "Connector", Manufacturer_Name=SAMTEC, Mouser Part Number=200-FTSH10501LDVKTR, RS Part Number=1803002P, Datasheet Link=http://suddendocs.samtec.com/catalog_english/ftsh_th.pdf, Height=5.56mm, Manufacturer_Part_Number=FTSH-105-01-L-DV-K-TR, Mouser Price/Stock=https://www.mouser.com/Search/Refine.aspx?Keyword=200-FTSH10501LDVKTR, RS Price/Stock=http://uk.rs-online.com/web/p/products/1803002P
J11 J12 J13 J14 J15 J16 J17 J18 J19: "Header, 2-Pin", Digi-Key Part Number=2073-BG301-02-A-0540-L-BCT-ND, Manufacturer_Name="Global Connector Technology", Manufacturer_Part_Number=BG301-04-A-0540-L-B, Digikey Price/Stock=https://www.digikey.com/product-detail/en/gct/BG301-04-A-0540-L-B/2073-BG301-04-A-0540-L-BCT-ND/9859670?utm_source=snapeda&utm_medium=aggregator&utm_campaign=symbol
L1: "Inductor", Digi-Key Part Number=SRN3015-220MCT-ND, Manufacturer_Name=Bourns, RS Part Number=7435087P, Allied_Number=70231649, Allied Price/Stock=https://www.alliedelec.com/bourns-srn3015-220m/70231649/, Digikey Price/Stock=https://www.digikey.com/products/en/inductors-coils-chokes/fixed-inductors/71?k=SRN3015-220M&k=&pkeyword=SRN3015-220M&sv=0&pv7=2&sf=0&quantity=&ColumnSort=0&page=1&pageSize=25, Manufacturer_Part_Number=SRN3015-220M, RS Price/Stock=http://uk.rs-online.com/web/p/products/7435087P
L2 L3: "Inductor", Manufacturer_Name="Murata Electronics", Mouser Part Number=81-LQP15MN1N9W02D, RS Part Number=7859073P, Datasheet Link=https://psearch.en.murata.com/inductor/product/LQP15MN1N9W02%23.html, Height=0.45mm, Manufacturer_Part_Number=LQP15MN1N9W02D, Mouser Price/Stock=https://www.mouser.com/Search/Refine.aspx?Keyword=81-LQP15MN1N9W02D, RS Price/Stock=http://uk.rs-online.com/web/p/products/7859073P
L100: "Ferrite Bead", Manufacturer_Name="Wurth Elektronik", Mouser Part Number=710-74279266, RS Part Number=1241858P, Datasheet Link=http://uk.rs-online.com/web/p/products/3674856, Height=1mm, Manufacturer_Part_Number=74279266, Mouser Price/Stock=https://www.mouser.com/Search/Refine.aspx?Keyword=710-74279266, RS Price/Stock=http://uk.rs-online.com/web/p/products/1241858P
L101: "Inductor", Manufacturer_Name=Bourns, Mouser Part Number=652-SRN3015-4R7M, RS Part Number=7435068, Allied_Number=70230754, Allied Price/Stock=https://www.alliedelec.com/bourns-srn3015-4r7m/70230754/, Datasheet Link=https://www.bourns.com/docs/Product-Datasheets/SRN3015.pdf, Height=1.5mm, Manufacturer_Part_Number=SRN3015-4R7M, Mouser Price/Stock=https://www.mouser.com/Search/Refine.aspx?Keyword=652-SRN3015-4R7M, RS Price/Stock=https://uk.rs-online.com/web/p/products/7435068
L102 L103: "Filter", Manufacturer_Name="Murata Electronics", Mouser Part Number=81-BLM11A601S, RS Part Number=0110380, Datasheet Link=https://www.murata.com/en-us/products/productdetail?partno=BLM18AG601SN1%23, Height=0.95mm, Manufacturer_Part_Number=BLM18AG601SN1D, Mouser Price/Stock=https://www.mouser.com/Search/Refine.aspx?Keyword=81-BLM11A601S, RS Price/Stock=http://uk.rs-online.com/web/p/products/0110380
LED1 LED2: "LED", Manufacturer_Name="ROHM Semiconductor", Mouser Part Number=755-SML-D12U1WT86, RS Part Number=1332870P, Datasheet Link=https://componentsearchengine.com/Datasheets/1/SML-D12U1WT86.pdf, Height=0.65mm, Manufacturer_Part_Number=SML-D12U1WT86, Mouser Price/Stock=https://www.mouser.com/Search/Refine.aspx?Keyword=755-SML-D12U1WT86, RS Price/Stock=http://uk.rs-online.com/web/p/products/1332870P
R1: "Resistor", Manufacturer_Name=Panasonic, Mouser Part Number=667-ERJ-3EKF2371V, Allied_Number=70265728, Allied Price/Stock=https://www.alliedelec.com/panasonic-erj-3ekf2371v/70265728/, Datasheet Link=http://industrial.panasonic.com/cdbs/www-data/pdf/RDA0000/AOA0000C86.pdf, Height=0.55mm, Manufacturer_Part_Number=ERJ-3EKF2371V, Mouser Price/Stock=https://www.mouser.com/ProductDetail/Panasonic/ERJ-3EKF2371V?qs=%2Fha2pyFadujWqMGonbcVXZxICkDa1SB1kWGUcP49AU%2F%252BFmOkSQluLg%3D%3D
R2: "Resistor", Manufacturer_Name="YAGEO (PHYCOMP)", Mouser Part Number=603-RC0603FR-071KL, RS Part Number=5048928, Datasheet Link=http://www.yageo.com/documents/recent/PYu-RC0603_51_RoHS_L_v5.pdf, Height=0.55mm, Manufacturer_Part_Number=RC0603FR-071KL, Mouser Price/Stock=https://www.mouser.com/Search/Refine.aspx?Keyword=603-RC0603FR-071KL
R3: "Resistor", Manufacturer_Name=Bourns, Mouser Part Number=652-CR0603FX-7503ELF, Datasheet Link=https://www.bourns.com/pdfs/chpreztr.pdf, Height=0.55mm, Manufacturer_Part_Number=CR0603-FX-7503ELF, Mouser Price/Stock=https://www.mouser.com/Search/Refine.aspx?Keyword=652-CR0603FX-7503ELF
R4: "Resistor", Manufacturer_Name=Bourns, Mouser Part Number=652-CR0603FX-2943ELF, Datasheet Link=https://www.bourns.com/pdfs/chpreztr.pdf, Height=0.55mm, Manufacturer_Part_Number=CR0603-FX-2943ELF, Mouser Price/Stock=https://www.mouser.com/Search/Refine.aspx?Keyword=652-CR0603FX-2943ELF
R5: "Resistor", Manufacturer_Name=Vishay, Mouser Part Number=71-CRCW0603-88.7K-E3, RS Part Number=8306693, Allied_Number=70203516, Allied Price/Stock=https://www.alliedelec.com/vishay-dale-crcw060388k7fkea/70203516/, Datasheet Link=http://www.vishay.com/docs/20035/dcrcwe3.pdf, Height=0.5mm, Manufacturer_Part_Number=CRCW060388K7FKEA, Mouser Price/Stock=https://www.mouser.com/ProductDetail/Vishay-Dale/CRCW060388K7FKEA?qs=sGAEpiMZZMu61qfTUdNhG%2Fy1ga03FwuGzQj1%2FlSzSQI%3D, RS Price/Stock=https://uk.rs-online.com/web/p/products/8306693
R6: "Resistor", Manufacturer_Name="YAGEO (PHYCOMP)", Mouser Part Number=603-RC0603FR-0722K1L, Datasheet Link=http://www.yageo.com/documents/recent/PYu-RC0603_51_RoHS_L_v5.pdf, Height=0.55mm, Manufacturer_Part_Number=RC0603FR-0722K1L, Mouser Price/Stock=https://www.mouser.com/Search/Refine.aspx?Keyword=603-RC0603FR-0722K1L
R10 R11: "Resistor", Digi-Key Part Number=541-0.0SBCT-ND, Manufacturer_Name="Vishay Dale", Manufacturer_Part_Number=CRCW06030000Z0EAHP, Detailed Description="0 Ohms Jumper 0.25W, 1/4W Chip Resistor 0603 (1608 Metric) Automotive AEC-Q200, Pulse Withstanding Thick Film", Digikey Price/Stock=https://www.digikey.com/product-detail/en/vishay-dale/CRCW06030000Z0EAHP/541-0.0SBCT-ND/2222749
  R11: Mounted=NM
R12 R300 R301: "Resistor", Manufacturer_Name=Vishay, Mouser Part Number=71-RCS06034K70FKEA, Datasheet Link=https://www.vishay.com/docs/20065/rcse3.pdf, Height=0.5mm, Manufacturer_Part_Number=RCS06034K70FKEA, Mouser Price/Stock=https://www.mouser.com/Search/Refine.aspx?Keyword=71-RCS06034K70FKEA
R13: library part CRGP0603F100R, "Fixed Resistor CRGP 0603 100R 1%", Digi-Key Part Number=A130404CT-ND, Manufacturer_Name="TE Connectivity", Package="1608 Rohm Semiconductor", Detailed Description="100 Ohms ±1% 0.25W, 1/4W Chip Resistor 0603 (1608 Metric) Pulse Withstanding Thick Film", Digikey Price/Stock=https://www.digikey.com/products/en?keywords=A130404CT-ND, Manufacturer_Part_Number=CRGP0603F100R
R100: "Resistor", Manufacturer_Name=Vishay, Mouser Part Number=71-CRCW02011R00FXED, Datasheet Link=http://www.vishay.com/docs/20035/dcrcwe3.pdf, Height=0.28mm, Manufacturer_Part_Number=CRCW02011R00FXED, Mouser Price/Stock=https://www.mouser.com/ProductDetail/Vishay-Dale/CRCW02011R00FXED?qs=%2Fha2pyFadui6t5gBae62oQRyxUBJXKblCCjJgQEYATm3qtSsMjWJCXYfShfmOL9Q
R211: "Resistor", Manufacturer_Name=Vishay, Mouser Part Number=71-CRCW02010000Z0ED, Allied_Number=70202068, Allied Price/Stock=https://www.alliedelec.com/vishay-dale-crcw02010000z0ed/70202068/, Datasheet Link=http://www.vishay.com/docs/20035/dcrcwe3.pdf, Height=0.28mm, Manufacturer_Part_Number=CRCW02010000Z0ED, Mouser Price/Stock=https://www.mouser.com/Search/Refine.aspx?Keyword=71-CRCW02010000Z0ED
S1: "Switch", Manufacturer_Name="TE Connectivity", Mouser Part Number=506-FSM4JH, RS Part Number=4791413P, Datasheet Link=http://www.farnell.com/datasheets/921681.pdf, Manufacturer_Part_Number=1825910-6, Mouser Price/Stock=https://www.mouser.com/Search/Refine.aspx?Keyword=N%2FA
U1: "MCP Series 16V Dual-Cell Li-Ion/Li-Polymer Battery Charge Management Controller", Digi-Key Part Number=MCP73213T-A6SI/MF, Manufacturer_Name=Microchip, Package="DFN-10 Microchip", Datasheet Link=http://ww1.microchip.com/downloads/en/DeviceDoc/20002190D.pdf, Digikey Price/Stock=https://www.digikey.com/product-detail/en/microchip-technology/MCP73213T-A6SI-MF/MCP73213T-A6SI-MFCT-ND/8628856?utm_adgroup=Integrated%20Circuits&slid=&gclid=EAIaIQobChMI7N75w5-p5QIVkMJkCh3tQQYeEAAYASAAEgJH9PD_BwE, Manufacturer_Part_Number=MCP73213-A6SI/MF, Price=None
U2: "Integrated Circuit", Manufacturer_Name="Texas Instruments", Mouser Part Number=595-TPS560430XFDBVR, Datasheet Link=http://www.ti.com/lit/ds/symlink/tps560430.pdf, Height=1.45mm, Manufacturer_Part_Number=TPS560430XFDBVR, Mouser Price/Stock=https://www.mouser.com/Search/Refine.aspx?Keyword=595-TPS560430XFDBVR
U3: "3V3 Low Dropout Regulator", Manufacturer_Name="Texas Instruments", Manufacturer_Part_Number=LM1117MPX-3.3/NOPB, Mouser Part Number=926-LM1117MPX3.3NOPB, Package="SOT-223-4 Texas Instruments", Datasheet Link=http://www.ti.com/lit/ds/symlink/lm1117.pdf, Mouser Price/Stock=https://www.mouser.com/ProductDetail/Texas-Instruments/LM1117MPX-33-NOPB?qs=X1J7HmVL2ZHRbBIxXi4utg%3D%3D, Price=None
U4: "Mini AB, USB 2.0, 1 A, Right Angle, Surface Mount _SMT_, USB Receptacle", Digi-Key Part Number=102-5891-1-ND, Manufacturer_Name="CUI Inc.", Manufacturer_Part_Number=UJ2-MBH-3-SMT-TR, Package=None, Digikey Price/Stock=https://www.digikey.com/products/en?keywords=102-5891-1-ND, Price=None
U5: "Integrated Circuit", Manufacturer_Name="Silicon Labs", Mouser Part Number=634-EFR32BG13P632-C, Datasheet Link=https://www.silabs.com/documents/login/data-sheets/efr32bg13-datasheet.pdf, Height=0.9mm, Manufacturer_Part_Number=EFR32BG13P632F512GM48-C, Mouser Price/Stock=https://www.mouser.com/Search/Refine.aspx?Keyword=634-EFR32BG13P632-C
Y1: "Crystal or Oscillator", Manufacturer_Name="MICRO CRYSTAL", Mouser Part Number=428-201494-MC01, Datasheet Link=https://www.mouser.co.uk/datasheet/2/530/cm8v-t1a-1085761.pdf, Manufacturer_Part_Number=CM8V-T1A-32.768kHz-12.5pF-20PPM-TA-QC, Mouser Price/Stock=https://www.mouser.com/Search/Refine.aspx?Keyword=428-201494-MC01
Y2: "Crystal or Oscillator", Manufacturer_Name="Epson Timing", Manufacturer_Part_Number="FA-20H 38.4000MF10Z-AS3", Mouser Part Number=732-FA20H38.4F10ZAS3, Datasheet Link=https://support.epson.biz/td/api/doc_check.php?dl=brief_FA-20H_en.pdf, Height=0.55mm, Mouser Price/Stock=https://www.mouser.com/Search/Refine.aspx?Keyword=732-FA20H38.4F10ZAS3

## Via types
v1: diameter 26, hole 16, Top Layer to Bottom Layer, tented both sides, 110 vias
v2: diameter 26, hole 16, Top Layer to Bottom Layer, 69 vias

## Nets (pads, with @x,y where several pads share a name; then routed paths per layer and width w, separated by ;. In a path a pad name is that pad's centre, name@x,y a point inside that pad or via, vN(x,y) a via of type N, cw(c..) or ccw(c..) an arc to the next point about the centre after c; other vN are vias at no path point)
3V3: C110.2 C111.1 C114.1 C116.1 C201.2 C203.2 C205.2 J7.6 J9.1 J12.1 J19.2 L100.1 R211.1 R300.2 R301.2 U5.39 U5.40 U5.42 | length 6340
  Top Layer w7: U5.39 2231.5,831.5 2238,825 C111.1 ; U5.40 2247.25,899.75 2310,837 C116.1@2310,816.12 ; U5.42 2278.75,913.34 2330.82,861.27 2386.73,861.27 2410,838 2410,783 2429,764 C114.1@2457,764
  Top Layer w20: J7.6 1432,290 1380,342 1380,595 1442,657 J9.1@1530,657 ; 1648.47,812.47 1630,794 1594,794 1564,764 1564,667.43 1574.43,657 J9.1 J9.1@1530,657 ; 1648.47,812.52 1698,862.04 J12.1@1698,892 ; C203.2 C205.2 C201.2 1637,992 1711,918 J12.1 1918,892 1942,868 ; R300.2@1898,530.06 R300.2@1900.94,533 ; L100.1 1958,1108 1940,1090 1940,992.43 1942,990.43 1942,868 ; C116.1@2310,816.12 2308.56,814.68 C111.1 2237.44,814.12 C110.2 1973.12,814.12 1942,783 ; R211.1 2447.22,1682.78 2400,1730 1670,1730 1625,1685 1625,1570 1676,1519 1747,1519 1795,1471 1795,1221 1759,1185 1605,1185 1555,1135 1555,1005 1430,880 J19.2 1495,840 1530,805 J9.1@1530,657 ; C114.1 2458,764.44 2458,708 2440,690 2040,690 1981.47,631.47 R301.2 R300.2@1900.94,533 ; R300.2@1900.94,533 1895,538.94 1895,618.59 1940,663.59 1940,781 1942,783 ; 1942,783 1942,868
5V: C6.1 J18.1 L1.2 R5.2 | length 885.4
  Top Layer w20: L1.2@998.31,665 1072.44,665 C6.1@1072.44,667.19 ; C6.1 1107.56,667.56 1140,700 R5.2 1175.47,725.47 1200,750 J18.1@1200,1380
AVDD: C112.2 C113.2 R100.2 U5.34 | length 192.8
  Top Layer w7: C112.2 1996,972.44 C113.2 2094.44,972.44 2098,976 2098,989.78 2101.96,993.74 U5.34
DECOUPLE: C117.1 U5.41 | length 171.2
  Top Layer w7: U5.41 2263,907 2326,844 2340,844 C117.1@2370,814
GND: AT1.2 C1.2 C2.1 C3.1 C4.1 C6.2 C7.1 C8.1 C9.1 C102.2 C103.2 C106.2 C107.2 C110.1 C111.2 C112.1 C113.1 C114.2 C115.2 C116.2 C117.2 C201.1 C203.1 C205.1 D1.2 J1.2 J1.3 J2.1 J3.1 J6.1 J6.2 J7.5 J8.1 J9.2 J12.2 J14.2 J15.2 J16.2 LED1.1 R1.1 R4.1 R6.1 R13.2 U1.8 U1.9 U1.11 U2.2 U3.1 U4.5 U4.SH1 U4.SH2 U4.SH3 U4.SH4 U5.14 U5.15 U5.16 U5.37 U5.49 Y2.2 Y2.4 | length 3091
  Top Layer w7: U5.37 2200.01,957.01 U5.49@2223,980 ; U5.49@2325.99,1125 U5.16@2325.99,1155 ; U5.49@2341.74,1127 U5.15 ; U5.49@2357.49,1119.72 U5.14 ; Y2.2@2504.44,1089.44 Y2.4@2550,1135
  Top Layer w20: v2(528,1249) v2(559,1249) ; 557.8,1501.18 557.8,1716.93 ; C3.1 v2(668,808) ; 686.39,1673 718,1673 ; v2(700,905) 700,852.5 R4.1 ; 885,1230 888,1233 889,1232 v2(961,1232) ; U4.SH1@908.98,1554.25 908.98,1770 U4.SH4@589.39,1770 ; U2.2@974.21,804 U2.2 1016,806 1033,823 v2(1034,823) ; R1.1 1044.74,1262.26 v2(1045,1262) ; C6.2 1127.56,612.44 v2(1130,610) ; R6.1@1070.5,923 v2(1117,923) ; v2(1220,1550) D1.2 ; U3.1@1266,1036 1270,1032 v2(1270,940) ; J7.5 v2(1532,304) ; C7.1@1615,1255 C7.1 v2(1615,1325) ; C201.1 1637,1100 ; J9.2 v2(1787,657) ; v2(1698,729) J12.2@1698,792 ; C205.1 v2(1722,1106) ; v2(1807,1110) C203.1 C203.1@1809.19,1068.83 ; C112.1 v2(1995,1058) ; C113.1 v2(2050,1056) ; v2(2093.5,537.5) LED1.1 ; v2(2125,1620) J8.1 ; C110.1 C110.1@2170,758 ; U5.49@2223,985.24 U5.49 U5.49@2357.49,1119.72 ; C111.2@2236,757.56 C111.2 ; C106.2 2361.56,1323 v2(2391,1323) ; C107.2 2343,1367 2344,1366 v2(2392,1366) ; v2(2445,850) 2457,838 C114.2 ; R13.2 v2(2629.29,450.71) ; Y2.2 Y2.2@2504.44,1089.44 ; Y2.4 v2(2617.46,1150.46) ; C102.2 C103.2@2668.44,944.44 ; v2(2668.88,807.88) C115.2 ; v2(2683.6,903.4) C103.2 ; v1(2931,1787.82) v1@2931,1803.82 ; v1(2931,1815.82) v1@2931,1803.82 ; AT1.2 v1@2931,1803.82 ; U4.SH4@589.39,1770 564,1795.39 U4.SH4 U4.SH4@589.39,1770
  Bottom Layer w20: v2(1698,729) 1715,729 ; v2@1803,1106 v2(1807,1110) ; v2(2629.29,450.71) v2@2629.29,455.04
  other v1: 2079,40 2129,40 2179,40 2229,40 2279,40 2328,40 2378,40 2428,40 2478,40 2528,40 2580,40 2630,40 2680,40 2730,40 2780,40 2833,40 2882,40 2935,40 2882,90 2935,90 2882,140 2935,140 2882,190 2935,190 2882,240 2935,240 2882,290 2935,290 2882,340 2935,340 2882,390 2935,390 2882,440 2935,440 2882,490 2935,490 2882,540 2935,540 2882,590 2935,590 2882,640 2935,640 2882,690 2935,690 2882,740 2935,740 2882,790 2935,790 2882,840 2935,840 2882,890 2935,890 2882,940 2935,940 2258,990 2288,990 2318,990 2348,990 2882,990 2935,990 2225,991 2223,1025 2318,1025 2348,1025 2288,1026 2256,1027 2882,1040 2935,1040 2223,1065 2258,1065 2293,1065 2323,1065 2351,1066 2882,1090 2935,1090 2323,1104 2223,1105 2258,1105 2288,1105 2351,1105 2882,1140 2935,1140 2882,1190 2935,1190 2882,1240 2935,1240 2882,1290 2935,1290 2882,1340 2935,1340 2882,1390 2935,1390 2882,1440 2935,1440 2882,1490 2935,1490 2882,1540 2935,1540 2882,1590 2935,1590 2931,1726.82 2593,1815.82 2645,1815.82 2695,1815.82 2745,1815.82 2795,1815.82 2845,1815.82 2888,1815.82
  other v2: 909,721 943,721 2170,725 2236,725 2310,725 2373,725 1565,838 2130,858 862,896 894,896 930,897 1639,908 1888,933 1777,934 1836,934 1651,1110 836,1196 494,1211 528,1211 559,1211 836,1224 2644.04,1243 494,1249 836,1251 494,1284 527,1284 559,1285
HFXTAL_N: U5.10 Y2.3 | length 208.9
  Top Layer w7: U5.10 2443.02,1103.98 2472.29,1074.71 2472.29,1055.56 2479.85,1048 2529.03,1048 2559.56,1078.53 Y2.3
HFXTAL_P: U5.11 Y2.1 | length 114.8
  Top Layer w7: U5.11 2428.94,1119.72 2459.21,1150 Y2.1@2505,1150
LED: R12.1 U5.45 | length 608.5
  Top Layer w7: R12.1 2390,609 2507,726 2507,824.41 2455.13,876.27 2344.94,876.27 2325.99,895.22 U5.45 U5.45@2325.07,931.8
LFXTAL_N: U5.35 Y1.1 | length 200.2
  Top Layer w7: Y1.1 2015.47,874.07 2054.43,913.03 2065.03,913.03 2129.99,977.99 U5.35 U5.35@2169.73,977.24
LFXTAL_P: U5.36 Y1.2 | length 143.8
  Top Layer w7: Y1.2 2074.53,891.53 2145.24,962.24 U5.36
NetC1_1: C1.1 J1.1 LED2.2 U1.1 U1.2 | length 691.6
  Top Layer w7: 716,1278 720,1282
  Top Layer w20: J1.1@240,1313.78 256,1313.78 J1.1@261.22,1319 ; J1.1@261.22,1324 629,1324 ; 629,1319 670,1278 716,1278 716,1307 751,1342 LED2.2 ; 720,1282 751,1251 783,1251
NetC2_2: C2.2 J2.2 J16.1 U1.3 U1.4 | length 697.9
  Top Layer w7: J16.1@627,1051 J16.1 J16.1@632,1058
  Top Layer w20: J2.2 245,1045 249.5,1040.5 614.5,1040.5 J16.1@632,1058 ; J16.1@638,1072 638,1182 666,1210 785,1210
NetC3_2: C3.2 C4.2 J3.2 R3.2 U2.5 | length 932.8
  Top Layer w10: C3.2 C3.2@669.18,699.5
  Top Layer w20: J3.2 250,495 512.44,757.44 C4.2 580,715 596.68,698.32 C3.2 ; C3.2@669.18,699.5 R3.2 792.5,699.5 815,722 815,784 837,806 U2.5
NetC5_1: C5.1 L1.1 U2.6 | length 400.1
  Top Layer w7: L1.1@899.19,652.5 L1.1@901.69,650 ; L1.1@911.69,665 911.69,641.69 977,707 1072,707 C5.1@1085,720
  Top Layer w20: U2.6 873.79,651.91 L1.1
NetC5_2: C5.2 U2.1 | length 93
  Top Layer w10: U2.1 1010.4,768.6 1021.8,780 1060.44,780
NetC7_2: C7.2 J4.2 U3.3 | length 840.6
  Top Layer w20: J4.2@1410,1695 1425,1695 1615,1505 C7.2 1615,1430 1470,1285 1470,1195 1451,1176 U3.3
NetC8_2: C8.2 J19.1 U3.2 | length 368.2
  Top Layer w7: J19.1 J19.1@1331.88,840
  Top Layer w20: C8.2 1290,755 1330,795 1334.67,837 1334.94,839.45 1331.88,837.31 1331.88,840 1331.88,906.88 1362,937 1362,1030 U3.2@1356,1036
NetC9_2: C9.2 L2.2 R10.1 R11.1 | length 187.9
  Top Layer w7: 2376.65,1240 C9.2 ; R10.1 2448.98,1346.53 R11.1 2447.93,1293.94 C9.2 ; C9.2@2456.89,1240 C9.2
NetD1_1: D1.1 F1.2 J17.2 | length 270.4
  Top Layer w7: F1.2 F1.2@1105,1620 ; J17.2 J17.2@1140,1535 ; D1.1@1214.68,1620 D1.1@1220,1614.69
  Top Layer w20: F1.2 1070,1605 J17.2@1140,1535 ; F1.2@1120.79,1620 D1.1@1214.68,1620
NetF1_1: F1.1 J4.1 | length 286
  Top Layer w20: F1.1 1198.9,1801.1 J4.1
NetF_Antenna_1: AT1.1 L3.2 | length 524.9
  Top Layer w7: L3.2 L3.2@2548.69,1403.03
  Top Layer w10: L3.2@2557.65,1403.03 2805.45,1650.82 AT1.1
NetJ4_3: J4.3 J8.4 J14.1 J18.2 | length 1689.7
  Top Layer w12: J14.1 1325,1605 1361,1641 1361,1731 1376,1746 1454,1746 J4.3
  Top Layer w20: J18.2 1305,1430 1325,1450 J14.1 ; J4.3 1555,1690 1635,1770 2435,1770 2505,1700 J8.4
NetJ6_3: J6.3 R11.2 | length 82.2
  Top Layer w7: R11.2 2511.04,1298 J6.3
NetJ7_1: J7.1 U5.46 | length 1157
  Top Layer w7: J7.1@1925,233.71 2051.43,233.71 2522,704.28 2522,830.62 2461.35,891.27 2355.52,891.27 2341.74,905.05 U5.46
NetJ7_3: J7.3 J11.1 R301.1 U5.47 | length 1916.8
  Top Layer w7: J7.3@1729,225 1772,182 2020.93,182 2537,698.07 2537,836.83 2467.56,906.27 2364.56,906.27 2357.49,913.34 U5.47 ; J7.3 1732,318.57 1763.43,350 1915,350 J11.1 2040.53,475.53 R301.1@2040.53,532
NetJ7_4: J7.4 J11.2 R300.1 U5.48 | length 2039.5
  Top Layer w7: J7.4@1625,233.71 1691.71,167 2027.15,167 2552,691.85 2552,843.05 2472.85,922.19 2402.81,922.19 2392.28,932.72 U5.48 U5.48@2373.24,922.19 ; J7.4 1632,286 1687,341 1733.21,341 1768.21,376 1860,376 1880,396 J11.2 1880,431 1839,472 R300.1
NetJ8_2: J8.2 J13.1 U5.19 | length 546.5
  Top Layer w7: J13.1@2190,1437 J13.1@2197,1430 ; U5.19 2278.75,1211.32 2225.07,1265 2219.99,1265 2197,1287.99 J13.1 J13.1@2197,1430 ; J8.2 2305,1563 2197,1455 J13.1@2197,1430
NetJ8_3: J8.3 J13.2 U5.20 | length 860.5
  Top Layer w7: U5.20 2262.25,1165.75 2262.25,1206.6 2218.85,1250 2213.77,1250 2097,1366.77 J13.2 2097,1467 2155.61,1525.61 2194.35,1525.61 2237.66,1568.91 2237.66,1636.41 2280.97,1679.71 2390.29,1679.71 2405,1665 J8.3
NetJ9_4: J9.4 U5.26 | length 1118
  Top Layer w7: J9.4 1635,607 1623,619 1623,680 1644,701 1729,701 1806,778 v2(1806,845) ; v2(1809,973) 1831,973 1846,988 1846,1048.95 1882,1084.95 1882,1141.43 1931.57,1191 2078.79,1191 2149.31,1120.47 2169.73,1120.47 U5.26
  Bottom Layer w7: v2(1806,845) 1806,970 v2(1809,973) v2@1818,973
NetJ9_5: J9.5 U5.25 | length 1268
  Top Layer w7: J9.5@1532.88,560 J9.5 1596,557 1607,568 v2(1607,753) 1609,753 v2@1610,754 ; v2(1605,871) 1595,881 1595,1098.41 1652.59,1156 1875.36,1156 1925.36,1206 2085,1206 2155.53,1135.47 U5.25
  Bottom Layer w7: v2(1605,871) 1605,755 v2(1607,753)
NetJ9_6: J9.6 U5.3 | length 2428.4
  Top Layer w7: v2(1454,521) 1454,520 1441,507 1441,412.79 1499,354.79 1499,180 1573,106 2029.79,106 2597,673.21 2597,861.68 2464.94,993.74 U5.3 ; v2(1615,533) 1639,557 J9.6
  Bottom Layer w7: v2(1454,521) 1466,533 v2(1615,533)
NetJ9_7: J9.7 U5.2 | length 2072.6
  Top Layer w7: J9.7@1496,502 1490,508 1475,508 1457,490 1457,418 1579,296 1579,169 1616,132 2034.57,132 2582,679.43 2582,855.47 2459.48,977.99 U5.2 U5.2@2402.02,977.24
NetJ9_8: J9.8 U5.1 | length 1984.2
  Top Layer w7: v2(1599,320) 1599,182 1632,149 2030.36,149 2567,685.64 2567,849.26 2454.01,962.24 U5.1 ; v2(1602,391) 1607,391 1620,404 1620,492 1635,507 J9.8
  Bottom Layer w7: v2(1599,320) 1597,322 1602,327 v2(1602,391)
NetJ9_9: J9.9 U5.33 | length 1470.8
  Top Layer w7: J9.9 1535.88,387.12 1561.5,361.5 1688.5,361.5 1810,483 1810,564 1903,657 v2(1903,850) ; v2(1912,978) 1912,1129 1944,1161 2066,1161 2129.04,1097.96 2129.04,1026.09 2145.64,1009.49 U5.33@2158.87,1009.49 ; U5.33@2158.12,1010.24 U5.33@2158.87,1009.49 ; U5.33 U5.33@2158.87,1009.49
  Bottom Layer w7: v2(1903,850) 1911.5,858.5 1911.5,977.5 v2(1912,978)
NetJ9_10: J9.10 U5.32 | length 1199.2
  Top Layer w7: J9.10 1762.79,457 1795,489.21 1795,577 1848,630 v2(1848,839) ; v2(1865,969) 1865,1046.74 1897,1078.74 1897,1135.21 1937.79,1176 2072.21,1176 2144.04,1104.18 2144.04,1032.3 2150.19,1026.15 2151,1026.15 2151,1025.34 2151.1,1025.24 U5.32
  Bottom Layer w7: v2(1848,839) 1853,839 1865,851 1865,920.77 1864.5,921.27 1864.5,968.5 v2(1865,969)
NetJ10_1: J10.1 U5.24 | length 715.4
  Top Layer w7: J10.1 1710,1585.47 1721.94,1597.42 2129.36,1190 2194,1190 2200.01,1183.99 U5.24 U5.24@2200.5,1165.49
NetJ10_2: J10.2 U5.23 | length 657
  Top Layer w7: J10.2 1810,1530.57 2135.57,1205 2200.21,1205 2215.5,1189.71 2215.5,1165.26 U5.23 U5.23@2216.5,1165.75
NetJ10_3: J10.3 U5.22 | length 622.1
  Top Layer w7: J10.3 1910,1451.79 2141.79,1220 2206.43,1220 2231.5,1194.92 U5.22 U5.22@2232.25,1165.75
NetJ10_4: J10.4 U5.21 | length 586.1
  Top Layer w7: J10.4 2010,1373 2148,1235 2212.64,1235 2247.25,1200.39 U5.21
NetJ17_1: J17.1 U4.1 | length 366.4
  Top Layer w20: U4.1 802.58,1482.42 827,1458 1023,1458 1040,1475 J17.1
NetL2_1: L2.1 U5.17 | length 78.9
  Top Layer w7: U5.17 2310.24,1233.9 L2.1
NetL3_1: L3.1 R10.2 | length 55.9
  Top Layer w7: L3.1 2505.39,1349.18 R10.2
NetL100_2: L100.2 R100.1 | length 122.7
  Top Layer w7: L100.2 2068,1108 2098,1078 R100.1 R100.1@2098,1022.22
NetL103_1: L103.1 R211.2 | length 69.3
  Top Layer w7: L103.1@2350.53,1452 R211.2@2419.78,1452
NetLED1_2: LED1.2 R12.2 | length 80.5
  Top Layer w7: LED1.2@2149.53,609 LED1.2 R12.2@2230,609
NetLED2_1: LED2.1 R2.2 | length 458.6
  Top Layer w10: LED2.1 853,1342 884,1373 1082,1373 1106,1349 1106,1253 1066.5,1213.5 R2.2
NetR1_2: R1.2 U1.10 | length 131.5
  Top Layer w10: U1.10 929.37,1259.37 945,1275 945,1306 954,1315 R1.2
NetR2_1: R2.1 U1.7 | length 118.4
  Top Layer w10: U1.7 939.68,1200.31 955,1185 R2.1
NetR3_1: R3.1 R4.2 U2.4 | length 201.6
  Top Layer w10: R3.1 763,849.5 R4.2 772.09,843.4 U2.4
NetR5_1: R5.1 R6.2 U2.3 | length 323.8
  Top Layer w10: R6.2@1007.5,923 972.21,887.71 U2.3 1005.4,843.4 1022,860 1105,860 1140,825 R5.1
NetR13_1: R13.1 S1.3 | length 172.6
  Top Layer w7: R13.1 2547.24,302.05 S1.3
PAVDD: C106.1 C107.1 L103.2 U5.18 | length 299.1
  Top Layer w7: C106.1 2282,1298.56 2282,1229.28 2293.75,1217.53 2293.75,1165.75 U5.18 ; C107.1 C107.1@2291.47,1368.03
  Top Layer w10: C106.1 C107.1 ; C107.1@2291.47,1368.03 L103.2
RESET_N: J9.3 J15.1 S1.1 U5.12 | length 3109.1
  Top Layer w7: J9.3 1446,607 1420,581 1420,354 1484,290 1484,173.79 1566.79,91 2036,91 2502.95,557.95 S1.1 2642.95,557.95 2685.98,600.98 2786.98,600.98 2827,641 2827,993 2775,1045 2740,1045 2719,1066 2719,1121 J15.1@2694.57,1145.43 ; U5.12 2423.47,1135.47 2476,1188 2627,1188 2661.01,1148.11 J15.1@2694.57,1145.43 ; J15.1@2687.5,1152.5 J15.1@2688.27,1151.73 ; J15.1@2710,1150 2700.46,1150.76 2697.16,1151.02 J15.1@2688.27,1151.73 ; J15.1@2688.27,1151.73 J15.1@2694.57,1145.43
RFVDD: C102.1 C103.1 L102.2 U5.9 | length 394.9
  Top Layer w7: U5.9 2429.77,1088.23 2454,1064 2454,1048 2472,1030 2499.59,1030 2500.09,1030.5 2587.5,1030.5 C102.1@2616,1002 ; C102.1@2604.74,997 C102.1@2614.74,987 ; C102.1 C102.1@2616,1002 ; C102.1@2625.72,999.56 2618.87,1001.28 C102.1@2616,1002 ; C103.1@2675.72,999.56 L102.2@2734.23,999.56
  Top Layer w20: C102.1@2625.72,999.56 C103.1@2675.72,999.56
VDCDC: C115.1 L101.2 L102.1 | length 362.1
  Top Layer w7: C115.1 2735.26,866.26 2735.26,932.74 L102.1@2740,937.47 ; L101.2@2780,725 2762.78,725 2762.78,925.22 L102.1@2750.53,937.47 ; L102.1@2740,937.47 L102.1@2750.53,937.47 ; L102.1@2740,937.47 2740,948 L102.1@2750.53,937.47
  Top Layer w10: L101.2@2760.49,725 L101.2@2762.78,725
VREGSW: L101.1 U5.38 | length 862.8
  Top Layer w7: v2(2155,918) 2158.52,918 2170.25,906.27 2208.69,906.27 2215.76,913.34 U5.38
  Top Layer w10: v2(2508,996) 2633.32,870.68 2633.32,745.43 L101.1
  Bottom Layer w7: v2(2155,918) 2194,957 2369,957 2378,966 2378,1011.52 2383.48,1017 2487,1017 v2(2508,996)
pads on no net: J7.2 S1.2 S1.4 U1.5 U1.6 U3.4 U4.2 U4.3 U4.4 U4.None U5.4 U5.5 U5.6 U5.7 U5.8 U5.13 U5.27 U5.28 U5.29 U5.30 U5.31 U5.43 U5.44

## Polygon pours and split planes (outlines as drawn)
GND on Bottom Layer "GND_BTM" (solid, remove dead copper, pour order 0): 17,1848 2954,1848 2954,9.75 17,15.17
GND on Top Layer "GND_BTM" (solid, remove dead copper, pour order 6): 2953,1858 16,1858 16,26 2953,26

## Keep-outs
Keep-Out Layer:
  lines w10: 0,1 1,0 3349,0 3350,1 3350,1864 3349,1865 0,1865 0,1

## Silkscreen, mask and mechanical layers (free items; w line width, h text height)
Top Overlay:
  drawing of 955 lines, arcs and shapes, not listed
  text "1" at 1231,1913 h60
  text "1" at 1649,1728 h60
  text "1" at 2147,1637 h60
  text "1" at 1653,1632 h60